# Altium PCB SOP-8_L4.9-W3.9-P1.27-LS6.0-TL-EP-1_2022-06-29.pcbdoc
Units mm, origin at the board's own origin, x right, y up, seen from the top; angles counter-clockwise.
Board outline 36.83 x 31.15 mm, 2 copper layers (Top Layer, Bottom Layer); 1 components, 0 nets, 9 pads, 0 vias.
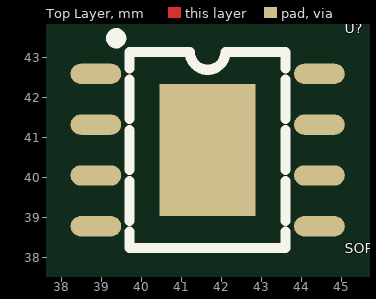
[diagram p0: Top Layer view]
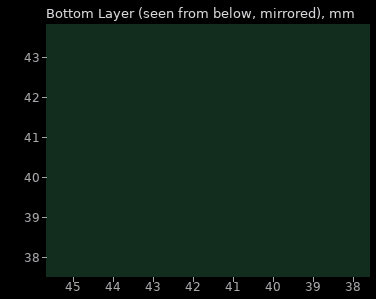
[diagram p1: Bottom Layer view, seen from below]

## Layer stack, top to bottom
Top Layer: signal copper (thickness not stored)
Dielectric: dielectric 0.32, FR-4, Dk 4.8
Bottom Layer: signal copper (thickness not stored)

## Board outline
62.23,25.4 25.4,25.4 25.4,56.552 62.23,56.552

## Components (designator, comment, footprint, x,y, rotation, side; value= is the part's Value field where it differs from the comment)
U? "SOP-8_L4.9-W3.9-P1.27-LS6.0-TL-EP-1" SOP-8_L4.9-W3.9-P1.27-LS6.0-TL-EP-1 41.593,40.849 r0 top

## Footprints (in the part's own frame and the unit in brackets; to place one, negate y for a bottom-side part, rotate by r counter-clockwise, add the part's x,y. Pads: shape width x height; smd on the part's side, far side on the other; paste and mask are expansions set on the pad)
SOP-8_L4.9-W3.9-P1.27-LS6.0-TL-EP-1 [mil]
  oval 50x20 smd: 1(-107.5,68.23) 2(-107.5,18.23) 3(-107.5,-31.77) 4(-107.5,-81.77) 5(112.5,-81.77) 6(112.5,-31.77) 7(112.5,18.23) 8(112.5,68.23)
  rect 94.49x129.92 smd: 9(2.5,-6.77)
  silkscreen extent -92,-103 79,108

## Nets (pads, with @x,y where several pads share a name; then routed paths per layer and width w, separated by ;. In a path a pad name is that pad's centre, name@x,y a point inside that pad or via, vN(x,y) a via of type N, cw(c..) or ccw(c..) an arc to the next point about the centre after c; other vN are vias at no path point)
pads on no net: U?.1 U?.2 U?.3 U?.4 U?.5 U?.6 U?.7 U?.8 U?.9